# Altium PCB Programador_PCB.PcbDoc
Units mil, origin at the board's own origin, x right, y up, seen from the top; angles counter-clockwise.
Board outline 2505 x 845 mil, 2 copper layers (Top Layer, Bottom Layer); 47 components, 32 nets, 183 pads, 36 vias.
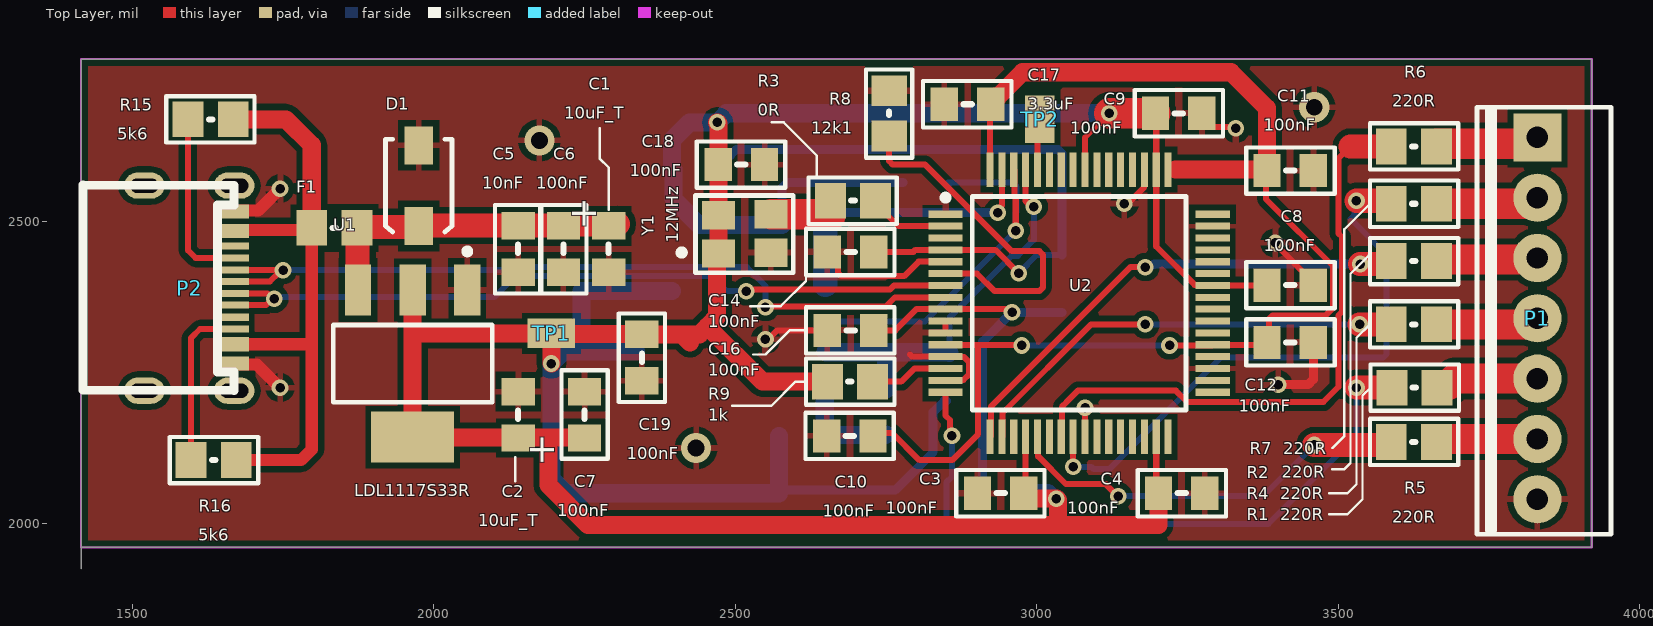
[diagram p0: Top Layer view]
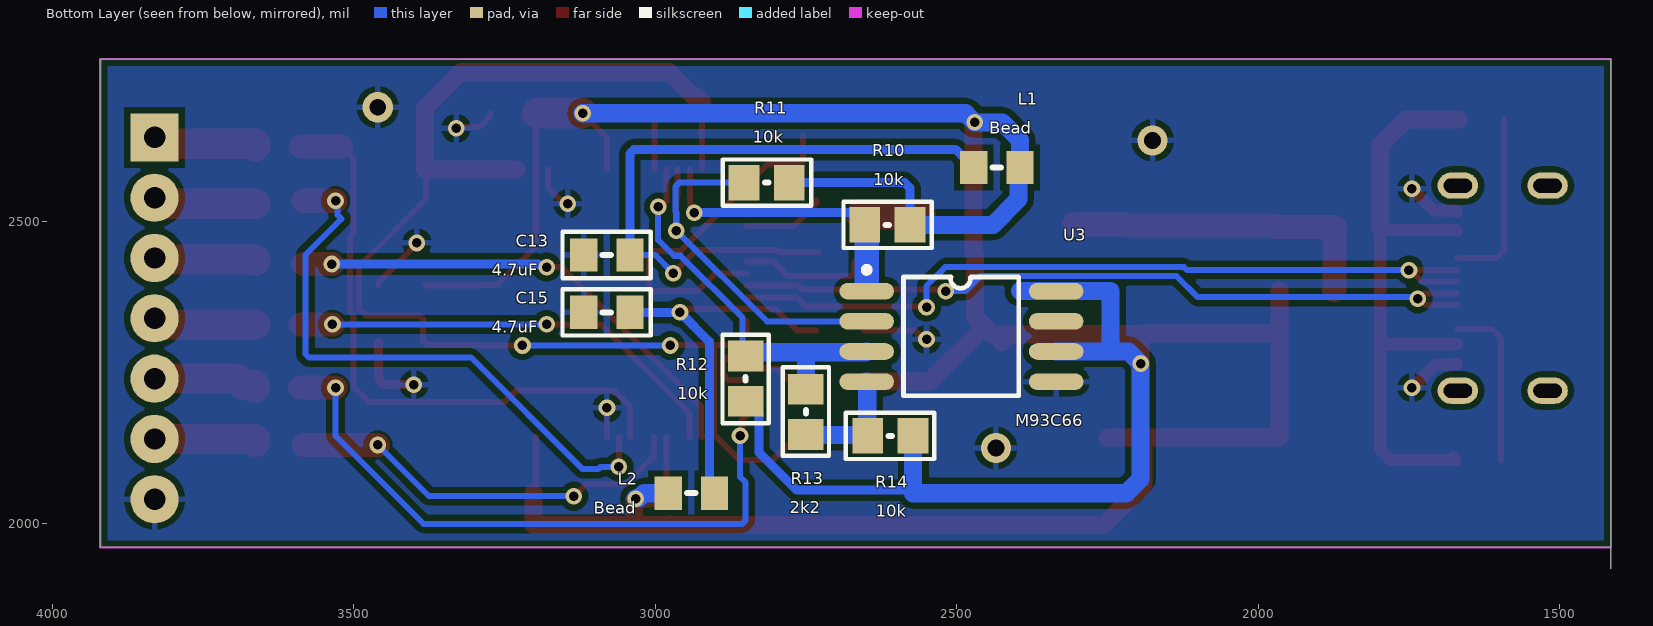
[diagram p1: Bottom Layer view, seen from below]
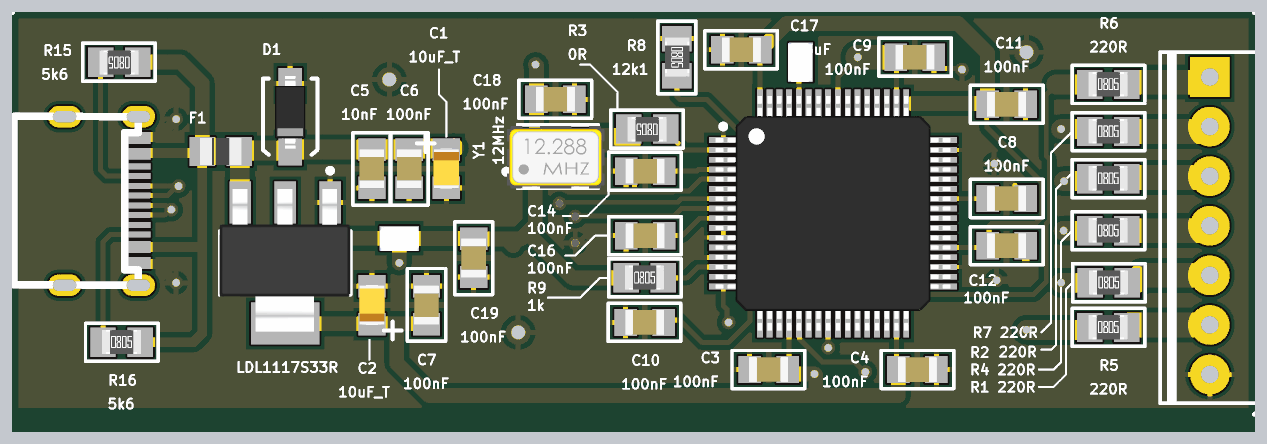
[diagram p2: 3D render of the assembled board from above, using the file's embedded part models]
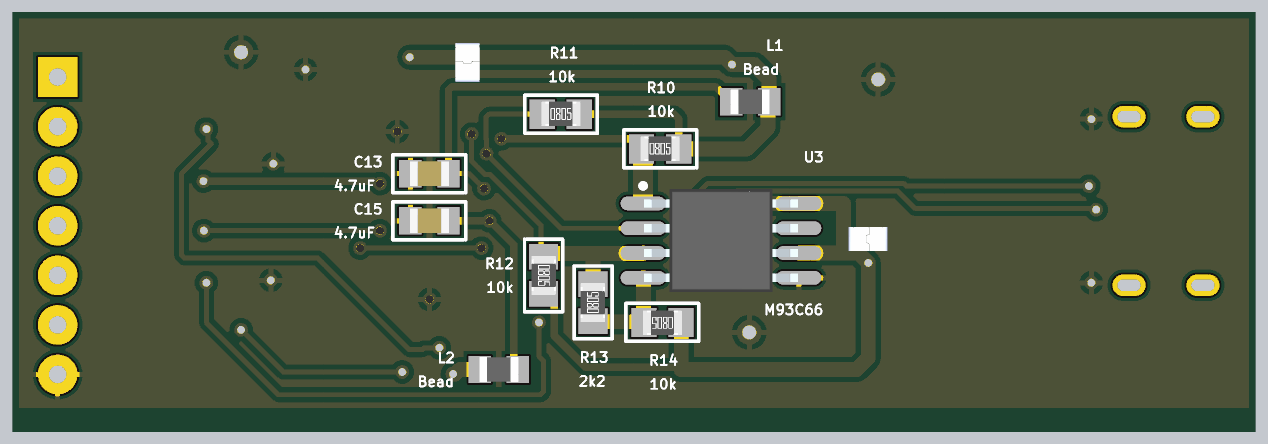
[diagram p3: 3D render of the assembled board from below, using the file's embedded part models]

## Layer stack, top to bottom
Top Solder: solder mask 0.4, Solder Resist, Dk 3.5
Top Layer: signal copper 1.4
Dielectric 1: dielectric 12.6, FR-4, Dk 4.8
Bottom Layer: signal copper 1.4
Bottom Solder: solder mask 0.4, Solder Resist, Dk 3.5

## Board outline
1415,1925 1415,2770 3920,2770 3920,1960 1415,1960

## Design rules (kind name [scope] priority, off if disabled: settings)
Clearance [All] p1: gap=10 ignorepadtopadclearanceinfootprint=FALSE except(0: Arc-Hole Track-Hole SMDPad-Hole THPad-Hole Via-Hole Fill-Hole Poly-Hole Region-Hole Text-Hole; 5: Arc-Arc Arc-Track Arc-SMDPad Arc-THPad Arc-Text Track-Track Track-SMDPad Track-THPad Track-Text SMDPad-SMDPad SMDPad-THPad SMDPad-Text THPad-THPad THPad-Text Via-Text Fill-Text Poly-Text Region-Text Text-Text)
PolygonConnect [All] p1: connectstyle=Relief reliefconductorwidth=10 reliefentries=4 polygonreliefangle="90 Angle" airgapwidth=10
RoutingVias [All] p1: holewidth=15.75 width=27.56 viastyle="Through Hole" minholewidth=15.75 minwidth=27.56 maxholewidth=15.75 maxwidth=27.56
SilkToSolderMaskClearance [IsPad] p1: minsilkscreentomaskgap=5 clearancetoexposedcopper=TRUE
SolderMaskExpansion [All] p1: expansion=4 istentingtop=FALSE
Width [All] p1: maxlimit=50 minlimit=10 preferedwidth=15 minimp=50.000000 maximp=50.000000 favimp=50.000000
29 further rules are at their usual default settings.

## Classes and differential pairs
component class USB_Programmer: C3 C4 C8 C9 C10 C11 C12 C13 C14 C15 C16 C17 C18 C19 L1 L2 P1 R1 R2 R3 R4 R5 R6 R7 R8 R9 R10 R11 R12 R13 R14 TP2 U2 U3 Y1
component class Power: C1 C2 C5 C6 C7 D1 F1 P2 R15 R16 TP1 U1

## Components (designator, comment, footprint, x,y, rotation, side; value= is the part's Value field where it differs from the comment)
C1 "10uF_T" C_0805_2013_c 2290,2455 r270 top
C2 "10uF_T" C_0805_2013_c 2140,2180 r90 top
C3 "100nF" C_0805_2013_b 2940,2050 r0 top
C4 "100nF" C_0805_2013_b 3240,2050 r180 top
C5 "10nF" C_0805_2013_b 2140,2455 r90 top
C6 "100nF" C_0805_2013_b 2215,2455 r90 top
C7 "100nF" C_0805_2013_b 2250,2180 r270 top
C8 "100nF" C_0805_2013_b 3420,2395 r180 top
C9 "100nF" C_0805_2013_b 3235,2680 r180 top
C10 "100nF" C_0805_2013_b 2690,2145 r0 top
C11 "100nF" C_0805_2013_b 3420,2585 r180 top
C12 "100nF" C_0805_2013_b 3420,2300 r180 top
C13 "4.7uF" C_0805_2013_b 3080,2445 r180 bottom
C14 "100nF" C_0805_2013_b 2690.98,2450 r0 top
C15 "4.7uF" C_0805_2013_b 3080,2350 r180 bottom
C16 "100nF" C_0805_2013_b 2690.98,2320 r0 top
C17 "3.3uF" C_0805_2013_b 2885,2695 r0 top value=0
C18 "100nF" C_0805_2013_b 2510,2595 r0 top
C19 "100nF" C_0805_2013_b 2345,2275 r90 top
D1 "MMSZ5231C-HE3_A-08" D_SOD-123 1975,2560 r270 top
F1 "0" F_0805_2012 1835,2490 r0 top
L1 "Bead" L_0805_2013 2433.39,2590 r0 bottom
L2 "Bead" L_0805_2013 2940,2050 r180 bottom
P1 "BORNERA 6 ENCH" P_CON1X7 3830,2290 r270 top
P2 "Conector_USB TIPO C" P_USB_C 1592,2544 r270 top
R1 "220R" R_0805_2012_a 3625.98,2225 r0 top
R2 "220R" R_0805_2012_a 3625,2435 r0 top
R3 "0R" R_0805_2012_a 2695,2535 r180 top
R4 "220R" R_0805_2012_a 3625,2330 r0 top
R5 "220R" R_0805_2012_a 3625,2135 r0 top
R6 "220R" R_0805_2012_a 3625,2625 r0 top
R7 "220R" R_0805_2012_a 3625,2530 r0 top
R8 "12k1" R_0805_2012_a 2755,2680 r270 top
R9 "1k" R_0805_2012_a 2690,2235 r0 top
R10 "10k" R_0805_2012_a 2615,2495 r180 bottom
R11 "10k" R_0805_2012_a 2815,2565 r180 bottom
R12 "10k" R_0805_2012_a 2850,2240 r270 bottom
R13 "2k2" R_0805_2012_a 2750,2185 r90 bottom
R14 "10k" R_0805_2012_a 2610,2145 r0 bottom
R15 "5k6" R_0805_2012_a 1630,2670 r180 top
R16 "5k6" R_0805_2012_a 1635,2105 r0 top
TP1 "SMD Test Point" "TP SMD" 2195,2315 r0 top
TP2 "Test Point suspended" "TP SMD" 3005,2670 r270 top
U1 "LDL1117S33R" U_SOT-223 1965,2265 r270 top value=LDL1117S25R
U2 "Value" U_TQFP-64 3070,2365 r0 top
U3 "M93C66" U_SO-8 2492.09,2310 r180 bottom
Y1 "12MHz" Y_SMD-XTAL-12MHz 2510,2480 r90 top

## Footprints (in the part's own frame and the unit in brackets; to place one, negate y for a bottom-side part, rotate by r counter-clockwise, add the part's x,y. Pads: shape width x height; smd on the part's side, far side on the other; paste and mask are expansions set on the pad)
C_0805_2013_b [mm] "Chip Capacitor; Body 2.0 x 1.3 mm (LxW typ)"
  rect 1.15x1.4 smd: 1(-0.975,0) 2(0.975,0)
  silkscreen extent -1.88,-0.97 1.85,0.97, body extent -1,-0.64 1,0.64, height 1.24
C_0805_2013_c [mm] "Chip Capacitor; Body 2.0 x 1.3 mm (LxW typ)"
  rect 1.15x1.4 smd: 1(-0.975,0) 2(0.975,0)
  silkscreen extent -0.18,0 0.18,0, body extent -1.02,-0.65 1.03,0.65, height 1.2
D_SOD-123 [mm] "SOD-123; 2 Leads; Body 2.7 x 1.6 mm, (LxW)"
  rect 1.6x1.2 smd: 1(1.7,0) 2(-1.7,0)
  silkscreen extent -1.95,-1.4 1.95,1.4, body extent -2.09,-0.78 1.63,0.77, height 1.35
F_0805_2012 [mm] "Chip Fuse; Body 2.0 x 1.3 mm (LxW typ)"
  rect 1.3x1.5 smd: 1(-0.95,0) 2(0.95,0)
  silkscreen extent -0.08,0 0.08,0, body extent -1.05,-0.7 1.05,0.7, height 0.56
L_0805_2013 [mm] "Chip Inductor; Body 2.0 x 1.3 mm (LxW typ)"
  rect 1.15x1.4 smd: 1(-0.975,0) 2(0.975,0)
  silkscreen extent -0.18,0 0.18,0, body extent -1,-0.64 1,0.64, height 1.04
P_CON1X7 [mil]
  rect 80x80 hole 35.43: 1(-350,0)
  round 80 hole 35.43: 2(-250,0) 3(-150,0) 4(-50,0) 5(50,0) 6(150,0) 7(250,0)
  silkscreen extent -400,-100 308,122
P_USB_C [mm]
  rect 0.6x1.2 smd: 1(0.686,1.981) 2(1.499,1.981) 11(6.274,1.981) 12(7.087,1.981)
  rect 0.3x1.2 smd: 3(2.14,1.977) 4(2.636,1.976) 5(3.144,1.972) 6(3.632,1.981) 7(4.14,1.981) 8(4.628,1.972) 9(5.136,1.976) 10(5.632,1.977)
  oval 1.1x1.7 hole 0.6 slot 1.2 at 90 deg: 15(-0.406,1.956) 16(-0.406,-1.829) 17(8.23,1.956) 18(8.23,-1.829)
  silkscreen extent -0.43,-4.42 8.23,1.96
R_0805_2012_a [mm] "Chip Resistor; Body 2.0 x 1.3 mm (LxW typ)"
  rect 1.3x1.5 smd: 1(-0.95,0) 2(0.95,0)
  silkscreen extent -1.85,-0.97 1.88,0.97, body extent -1,-0.61 1,0.64, height 0.6
"TP SMD" [mm] "Test Point SMD"
  rect 2x1.25 smd: 1(0,0)
  body extent -0.99,-0.67 1.01,0.58, height 0.84
U_SO-8 [mm] "SOC, 8-Leads, Body 8x5.3mm, Pitch 1.27mm, IPC Low Density"
  oval 2.3x0.7 smd: 1(-3.99,1.905) 2(-3.99,0.635) 3(-3.99,-0.635) 4(-3.99,-1.905) 5(3.99,-1.905) 6(3.99,-0.635) 7(3.99,0.635) 8(3.99,1.905)
  silkscreen extent -4.11,-2.5 2.41,2.93, body extent -3.95,-2.64 3.95,2.64, height 2.16
U_SOT-223 [mm]
  rect 2.15x1.1 smd: 1(-3.1,2.3) 2(-3.1,0) 3(-3.1,-2.3)
  rect 2.15x3.5 smd: 4(3.1,0)
  silkscreen extent -4.85,-3.35 1.63,3.35, body extent -3.78,-3.37 3.52,3.33, height 1.8
U_TQFP-64 [mm]
  rect 1.45x0.3 smd: 1(-5.625,3.75) 2(-5.625,3.25) 3(-5.625,2.75) 4(-5.625,2.25) 5(-5.625,1.75) 6(-5.625,1.25) 7(-5.625,0.75) 8(-5.625,0.25) 9(-5.625,-0.25) 10(-5.625,-0.75) 11(-5.625,-1.25) 12(-5.625,-1.75) 13(-5.625,-2.25) 14(-5.625,-2.75) 15(-5.625,-3.25) 16(-5.625,-3.75) 33(5.625,-3.75) 34(5.625,-3.25) 35(5.625,-2.75) 36(5.625,-2.25) 37(5.625,-1.75) 38(5.625,-1.25) 39(5.625,-0.75) 40(5.625,-0.25) 41(5.625,0.25) 42(5.625,0.75) 43(5.625,1.25) 44(5.625,1.75) 45(5.625,2.25) 46(5.625,2.75) 47(5.625,3.25) 48(5.625,3.75)
  rect 0.3x1.45 smd: 17(-3.75,-5.625) 18(-3.25,-5.625) 19(-2.75,-5.625) 20(-2.25,-5.625) 21(-1.75,-5.625) 22(-1.25,-5.625) 23(-0.75,-5.625) 24(-0.25,-5.625) 25(0.25,-5.625) 26(0.75,-5.625) 27(1.25,-5.625) 28(1.75,-5.625) 29(2.25,-5.625) 30(2.75,-5.625) 31(3.25,-5.625) 32(3.75,-5.625) 49(3.75,5.625) 50(3.25,5.625) 51(2.75,5.625) 52(2.25,5.625) 53(1.75,5.625) 54(1.25,5.625) 55(0.75,5.625) 56(0.25,5.625) 57(-0.25,5.625) 58(-0.75,5.625) 59(-1.25,5.625) 60(-1.75,5.625) 61(-2.25,5.625) 62(-2.75,5.625) 63(-3.25,5.625) 64(-3.75,5.625)
  silkscreen extent -5.75,-4.5 4.5,4.57, body extent -6.01,-6.01 6.01,6.01, height 1.55
Y_SMD-XTAL-12MHz [mil]
  rect 47.24x55.12 smd: 1(-32.5,38) 2(-31,-49) 3(32.5,-49) 4(31,38)
  silkscreen extent -64,-86 64,104, body extent -65,-99 61,98, height 47

## Part data
C1 C2: library part C_10uF_10V_b, "Capacitor SMD 0805 Tant", Manufacturer=Vishay, Manufacturer Part Number=TMCP1A106MTRF, Supplier Part Number 1=74-TMCP1A106MTRF, Category="Tantalum Capacitors", Pricing 1="1=0,3, 10=0,152, 50=0,152, 100=0,098, 1000=0,082, 10000=0,067 (USD)", RoHS=Yes, RoHS Compliant=Yes, Stock 1=7293, Supplier 1=Mouser
C3 C4 C6 C7 C8 C9 C10 C11 C12 C14 C16 C18 C19: library part C_100nF_50V_b, "Capacitor SMD 0805", Case Code (Imperial)=0805, Case Code (Metric)=2012, Dielectric=X7R, Insulation Resistance=100GR, Manufacturer=Yageo, Manufacturer Part Number=CC0805KRX7R9BB104, Max Operating Temperature=125°C, Min Operating Temperature=-55°C, Package Quantity=4000, Supplier Part Number 1=311-1140-1-ND, Tolerance=10%, Voltage=50V, Case/Package=0805, Category="Ceramic Capacitors", ComponentLink1Description=https://datasheet.ciiva.com/11786/0900766b80d84f1d-11786009.pdf?src-supplier=Rs, ComponentLink1URL=https://datasheet.ciiva.com/11786/0900766b80d84f1d-11786009.pdf?src-supplier=Rs, ComponentLink2Description=https://datasheet.ciiva.com/46393/1734573-46393307.pdf?src-supplier=Element14, ComponentLink2URL=https://datasheet.ciiva.com/46393/1734573-46393307.pdf?src-supplier=Element14, ComponentLink3Description=https://datasheet.ciiva.com/155/mlccorderingcode-155930.pdf?src-supplier=Digikey, ComponentLink3URL=https://datasheet.ciiva.com/155/mlccorderingcode-155930.pdf?src-supplier=Digikey, ComponentLink4Description=https://datasheet.ciiva.com/155/mlccorderingcode-155929.pdf?src-supplier=Digikey, ComponentLink4URL=https://datasheet.ciiva.com/155/mlccorderingcode-155929.pdf?src-supplier=Digikey, ComponentLink5Description=https://datasheet.ciiva.com/155/mlccorderingcode-155931.pdf?src-supplier=Digikey, ComponentLink5URL=https://datasheet.ciiva.com/155/mlccorderingcode-155931.pdf?src-supplier=Digikey, ComponentLink6Description=https://datasheet.ciiva.com/11464/upy-gphc-x7r-6-3v-to-50v-8-11464757.pdf?src-supplier=Avnet, ComponentLink6URL=https://datasheet.ciiva.com/11464/upy-gphc-x7r-6-3v-to-50v-8-11464757.pdf?src-supplier=Avnet, ComponentLink7Description=https://datasheet.ciiva.com/28450/1489800-28450805.pdf?src-supplier=Element14, ComponentLink7URL=https://datasheet.ciiva.com/28450/1489800-28450805.pdf?src-supplier=Element14, ComponentLink8Description=https://datasheet.ciiva.com/29242/445210-da-01-en-kerko-chip-0805-x7r-0-1uf-10proz-50vg-29242074.pdf?src-supplier=Conrad, ComponentLink8URL=https://datasheet.ciiva.com/29242/445210-da-01-en-kerko-chip-0805-x7r-0-1uf-10proz-50vg-29242074.pdf?src-supplier=Conrad, Depth=1.25mm, Halogen Free=5694HalogenFree, Height=0.85mm, Lead Free=5697LeadFree, Length=2mm, Material=Ceramic, Mounting Technology="Surface Mount", Packaging="Tape and Reel", Pins=2, Pricing 1="1=0,1, 10=0,07, 50=0,0418, 100=0,0329, 500=0,02428, 1000=0,0201 (USD)", Radiation Hardening=No, Reach SVHC Compliant=No, RoHS=Yes, RoHS Compliant=Yes, Series=CC, Stock 1=5306374, Supplier 1=Digikey, Termination=SMD/SMT, Voltage Rating=50V
C5: library part C_10nF_50V_b, "Capacitor SMD 0805", Case Code (Imperial)=0805, Case Code (Metric)=2012, Dielectric=X7R, Dielectric Material=Ceramic, Manufacturer=KEMET, Manufacturer Part Number=C0805C103J5RAC7210, Max Operating Temperature=125°C, Min Operating Temperature=-55°C, Package Quantity=10000, Supplier Part Number 1=80-C0805C103J5R7210, Tolerance=5%, Voltage Rating=50V, Case/Package=0805, Category="Ceramic Capacitors", ComponentLink1Description=http://www.mouser.com/ds/2/212/KEM_C1002_X7R_SMD-1102033.pdf?src-supplier=Mouser, ComponentLink1URL=http://www.mouser.com/ds/2/212/KEM_C1002_X7R_SMD-1102033.pdf?src-supplier=Mouser, ComponentLink2Description=http://components.arrow.com/part/dataview/3450688S9650973N7429?src-supplier=Arrow+Electronics, ComponentLink2URL=http://components.arrow.com/part/dataview/3450688S9650973N7429?src-supplier=Arrow+Electronics, ComponentLink3Description=https://datasheet.octopart.com/C0805C103J5RAC7210-KEMET-datasheet-68331906.pdf?src-supplier=Farnell, ComponentLink3URL=https://datasheet.octopart.com/C0805C103J5RAC7210-KEMET-datasheet-68331906.pdf?src-supplier=Farnell, ComponentLink4Description=https://api.kemet.com/component-edge/download/datasheet/C0805C103J5RAC7210.pdf?src-supplier=Digikey, ComponentLink4URL=https://api.kemet.com/component-edge/download/datasheet/C0805C103J5RAC7210.pdf?src-supplier=Digikey, ComponentLink5Description=https://datasheet.octopart.com/C0805C103J5RAC7210-KEMET-datasheet-37550250.pdf?src-supplier=Electro+Sonic, ComponentLink5URL=https://datasheet.octopart.com/C0805C103J5RAC7210-KEMET-datasheet-37550250.pdf?src-supplier=Electro+Sonic, ComponentLink6Description=https://datasheet.octopart.com/C0805C103J5RAC7210-KEMET-datasheet-166547538.pdf?src-supplier=TME, ComponentLink6URL=https://datasheet.octopart.com/C0805C103J5RAC7210-KEMET-datasheet-166547538.pdf?src-supplier=TME, Depth=1.25mm, Lead Pitch=0.75mm, Length=2mm, Packaging="Tape and Reel", Pricing 1="1=0,1, 10=0,034, 50=0,034, 100=0,02, 1000=0,014, 10000=0,009 (USD)", RoHS=Yes, RoHS Compliant=Yes, Series="SMD Comm X7R", Stock 1=30128, Supplier 1=Mouser, Termination=SMD/SMT, Voltage Rating (DC)=50V
C13 C15: library part C_4.7uF_10V_b, "(Modificar) Capacitor SMD 0805"
C17: library part C_?F_?_b, "(Generico) Capacitor SMD 0805"
D1: library part D_MMSZ5231C-HE3_A-08, "Diode SMD SOD-123 Zener 5V1", Manufacturer="Vishay Semiconductors", Manufacturer Part Number=MMSZ5226C-E3-08, Max Operating Temperature=150°C, Max Power Dissipation=500mW, Max Reverse Leakage Current=25uA, Min Operating Temperature=-55°C, Package Quantity=3000, Supplier Part Number 1=78-MMSZ5231CHE3_A-08, Tolerance=2%, Zener Current=20mA, Zener Voltage=3.3V, Category="Zener Diodes", ComponentLink1Description=Datasheet, ComponentLink1URL=https://www.vishay.com/docs/86344/mmsz5225_to_mmsz5267.pdf, Impedance=28R, Mounting Technology="Surface Mount", Packaging="Tape and Reel", Power Dissipation=500mW, Pricing 1="1=0,29, 10=0,198, 50=0,198, 100=0,089, 1000=0,062, 10000=0,041 (USD)", RoHS=Yes, RoHS Compliant=Yes, Series="Automotive, AEC-Q101", Stock 1=14347, Supplier 1=Mouser, Voltage Tolerance=2%, Weight=0.000363oz
F1: library part F_?_0805, "(Generico) Fuse SMD 0805", Supplier Part Number 1=SF-1206S200-2CT-ND, LatestRevisionDate=17-Jul-2002, LatestRevisionNote="Re-released for DXP Platform.", Origin=TAIWAN, PackageDescription="Thru-Hole; 2 Leads", PackageReference=PIN-W2/E2.8, Published=8-Jun-2000, Publisher="Altium Limited", Supplier 1=Digi-Key
L1 L2: library part L_Bead, "Inductor SMD 0805", Case Code (Imperial)=0805, Case Code (Metric)=2012, Manufacturer=Pulse, Manufacturer Part Number=PE-0805PFB600ST, Max Current Rating=3A, Max Operating Temperature=105°C, Min Operating Temperature=-40°C, Package Quantity=4000, Supplier Part Number 1=673-PE-0805PFB600ST, Case/Package=0805, Category="Ferrite Beads and Chips", ComponentLink1Description=https://productfinder.pulseeng.com/doc_type/WEB301/doc_num/WC706/doc_part/WC706.pdf?src-supplier=Digikey, ComponentLink1URL=https://productfinder.pulseeng.com/doc_type/WEB301/doc_num/WC706/doc_part/WC706.pdf?src-supplier=Digikey, ComponentLink2Description=http://productfinder.pulseeng.com/products/datasheets/WC706.pdf?src-supplier=Digikey, ComponentLink2URL=http://productfinder.pulseeng.com/products/datasheets/WC706.pdf?src-supplier=Digikey, Height=0.041inch, Length=0.079inch, Mounting Technology="Surface Mount", Number of Lines=1, Packaging="Cut Tape", Pricing 1="1=0,1, 10=0,051, 50=0,051, 100=0,035, 1000=0,025, 10000=0,02 (USD)", RoHS=Yes, RoHS Compliant=Yes, Series=PFB, Stock 1=58506, Supplier 1=Mouser, Width=0.049inch
P1: library part "P_BORNERA 7", "Bornera 7"
P2: library part P_USB_C, "Conector USB tip C basico", Supplier Part Number 1=179-UJ20CHGSMT1P16TR, Supplier 1=Mouser
R1 R2 R4 R5 R6 R7: library part R_220R_b, "Resistor SMD 0805", Case Code (Imperial)=0805, Case Code (Metric)=2012, Manufacturer=Bourns, Manufacturer Part Number=CR0805-FX-2200ELF, Max Operating Temperature=155°C, Max Power Dissipation=125mW, Min Operating Temperature=-55°C, Package Quantity=5000, Supplier Part Number 1=CR0805-FX-2200ELFCT-ND, Temperature Coefficient=100ppm/°C, Tolerance=1%, Voltage Rating=150V, Case/Package=0805, Category="Chip SMD Resistors", ComponentLink1Description=https://datasheet.ciiva.com/5540/chpreztr-5540846.pdf?src-supplier=Mouser, ComponentLink1URL=https://datasheet.ciiva.com/5540/chpreztr-5540846.pdf?src-supplier=Mouser, Contact Plating=Tin, Features="Moisture Resistant", Height=0.5mm, Length=2mm, Mounting Technology="Surface Mount", Number of Terminations=2, Packaging="Tape and Reel", Power Rating=125mW, Pricing 1="1=0,1, 10=0,021, 50=0,0132, 100=0,011, 500=0,00744, 1000=0,00639 (USD)", Radiation Hardening=No, RoHS=Yes, RoHS Compliant=Yes, Series=CR0805, Stock 1=162372, Supplier 1=Digikey, Termination=SMD/SMT, Thickness=508um, Width=1.25mm
R3: library part R_0R_b, "Resistor SMD 0805", Case Code (Imperial)=0805, Case Code (Metric)=2012, Manufacturer="Stackpole Electronics", Manufacturer Part Number=RMCF0805ZT0R00, Max Operating Temperature=155°C, Max Power Dissipation=125mW, Min Operating Temperature=-55°C, Ratings=AEC-Q200, Supplier Part Number 1=RMCF0805ZT0R00CT-ND, Temperature Coefficient=200ppm/°C, Voltage Rating=150V, Case/Package=0805, Category="Chip SMD Resistors", ComponentLink1Description=https://datasheet.ciiva.com/15193/getdatasheetpartid-360417-15193658.pdf?src-supplier=Verical, ComponentLink1URL=https://datasheet.ciiva.com/15193/getdatasheetpartid-360417-15193658.pdf?src-supplier=Verical, Construction=Rectangular, Contact Plating=Tin,Matte, Depth=1.25mm, Features="Automotive AEC-Q200", Height=0.026inch, Lead Free="Lead Free", Length=2mm, Military Standard=Not, Mounting Technology="Surface Mount", Number of Terminations=2, Packaging="Tape and Reel", Power Rating=125mW, Pricing 1="1=0,1, 10=0,017, 25=0,0128, 50=0,0096, 100=0,0068, 250=0,00544, 500=0,00436, 1000=0,00321 (USD)", Radiation Hardening=No, RoHS=Yes, RoHS Compliant=Yes, Series=RMCF, Stock 1=1321891, Supplier 1=Digikey, Width=0.049inch
R8: library part R_12k1_b, "Resistor SMD 0805", Case Code (Imperial)=0805, Case Code (Metric)=2012, Manufacturer="Stackpole Electronics", Manufacturer Part Number=RMCF0805FT12K1, Max Operating Temperature=155°C, Max Power Dissipation=125mW, Min Operating Temperature=-55°C, Ratings=AEC-Q200, Supplier Part Number 1=RMCF0805FT12K1CT-ND, Temperature Coefficient=100ppm/°C, Tolerance=1%, Case/Package=0805, Category="Chip SMD Resistors", ComponentLink1Description=https://datasheet.ciiva.com/15193/getdatasheetpartid-483936-15193530.pdf?src-supplier=Verical, ComponentLink1URL=https://datasheet.ciiva.com/15193/getdatasheetpartid-483936-15193530.pdf?src-supplier=Verical, Construction=Rectangular, Contact Plating=Tin,Matte, Depth=1.25mm, Features="Automotive AEC-Q200", Height=0.026inch, Lead Free="Lead Free", Length=0.079inch, Military Standard=Not, Mounting Technology="Surface Mount", Number of Terminations=2, Packaging="Tape and Reel", Power Rating=125mW, Pricing 1="1=0,1, 10=0,02, 50=0,0124, 100=0,0103, 500=0,007, 1000=0,00601 (USD)", Radiation Hardening=No, RoHS=Yes, RoHS Compliant=Yes, Series=RMCF, Stock 1=644845, Supplier 1=Digikey, Width=0.049inch
R9: library part R_1k_b, "Resistor SMD 0805", Case Code (Imperial)=0805, Case Code (Metric)=2012, Manufacturer=Bourns, Manufacturer Part Number=CR0805-FX-1001ELF, Max Operating Temperature=155°C, Max Power Dissipation=125mW, Min Operating Temperature=-55°C, Package Quantity=5000, Resistance Tolerance=1%, Resistor Type="Thick Film", Supplier Part Number 1=CR0805-FX-1001ELFCT-ND, Temperature Coefficient=100ppm/°C, Voltage Rating=150V, Case/Package=0805, Category="Chip SMD Resistors", ComponentLink1Description=https://datasheet.ciiva.com/11810/0900766b80fcdb72-11810305.pdf?src-supplier=Rs, ComponentLink1URL=https://datasheet.ciiva.com/11810/0900766b80fcdb72-11810305.pdf?src-supplier=Rs, ComponentLink2Description=https://datasheet.ciiva.com/27049/775383-27049976.pdf?src-supplier=Jameco, ComponentLink2URL=https://datasheet.ciiva.com/27049/775383-27049976.pdf?src-supplier=Jameco, ComponentLink3Description=https://datasheet.ciiva.com/7986/1856384-7986222.pdf?src-supplier=Element14, ComponentLink3URL=https://datasheet.ciiva.com/7986/1856384-7986222.pdf?src-supplier=Element14, ComponentLink4Description=https://datasheet.ciiva.com/9123/chpreztr-9123643.pdf?src-supplier=Avnet, ComponentLink4URL=https://datasheet.ciiva.com/9123/chpreztr-9123643.pdf?src-supplier=Avnet, ComponentLink5Description=https://datasheet.ciiva.com/6547/chpreztr-6547422.pdf?src-supplier=Digikey, ComponentLink5URL=https://datasheet.ciiva.com/6547/chpreztr-6547422.pdf?src-supplier=Digikey, ComponentLink6Description=https://datasheet.ciiva.com/6547/chpreztr-6547423.pdf?src-supplier=Digikey, ComponentLink6URL=https://datasheet.ciiva.com/6547/chpreztr-6547423.pdf?src-supplier=Digikey, ComponentLink7Description=https://datasheet.ciiva.com/6547/chpreztr-6547421.pdf?src-supplier=Digikey, ComponentLink7URL=https://datasheet.ciiva.com/6547/chpreztr-6547421.pdf?src-supplier=Digikey, ComponentLink8Description=https://datasheet.ciiva.com/30129/159chpreztr-30129981.pdf?src-supplier=Onlinecomponents.com, ComponentLink8URL=https://datasheet.ciiva.com/30129/159chpreztr-30129981.pdf?src-supplier=Onlinecomponents.com, ComponentLink9Description=https://datasheet.ciiva.com/46394/691949-46394380.pdf?src-supplier=Element14, ComponentLink9URL=https://datasheet.ciiva.com/46394/691949-46394380.pdf?src-supplier=Element14, ComponentLink10Description=https://datasheet.ciiva.com/16722/70154685-16722677.pdf?src-supplier=Allied+Electronics, ComponentLink10URL=https://datasheet.ciiva.com/16722/70154685-16722677.pdf?src-supplier=Allied+Electronics, ComponentLink11Description=https://datasheet.ciiva.com/48692/001055506-da-01-en-smd-wid-cr0805-fx-1001elf-1k-ohm-1-8w-48692106.pdf?src-supplier=Conrad, ComponentLink11URL=https://datasheet.ciiva.com/48692/001055506-da-01-en-smd-wid-cr0805-fx-1001elf-1k-ohm-1-8w-48692106.pdf?src-supplier=Conrad, Contact Plating=Tin, Depth=1.25mm, Features="Moisture Resistant", Height=0.5mm, Length=2mm, Mounting Technology="Surface Mount", Number of Terminations=2, Packaging="Tape and Reel", Pins=2, Power Rating=125mW, Pricing 1="1=0,1, 10=0,021, 50=0,0132, 100=0,011, 500=0,00744, 1000=0,00639 (USD)", Radiation Hardening=No, Reach SVHC Compliant=No, RoHS=Yes, RoHS Compliant=Yes, Series=CR0805, Stock 1=453972, Supplier 1=Digikey, Technology="THICK FILM", Termination=SMD/SMT, Thickness=508um, Tolerance=1%, Voltage Rating (DC)=150V, Width=1.25mm
R10 R11 R12 R14: library part R_10k_b, "Resistor SMD 0805", Case Code (Imperial)=0805, Case Code (Metric)=2012, Manufacturer=Yageo, Manufacturer Part Number=AC0805FR-0710KL, Max Operating Temperature=155°C, Max Power Dissipation=125mW, Min Operating Temperature=-55°C, Package Quantity=1, Supplier Part Number 1=311-10KLGCT-ND, Temperature Coefficient=100ppm/°C, Tolerance=1%, Voltage Rating=150V, Case/Package=0805, Category="Chip SMD Resistors", ComponentLink1Description=http://www.yageo.com/NewPortal/yageodocoutput?fileName=/pdf/R-Chip/PYu-AC_51_RoHS_L_6.pdf&src-supplier=Digikey, ComponentLink1URL=http://www.yageo.com/NewPortal/yageodocoutput?fileName=/pdf/R-Chip/PYu-AC_51_RoHS_L_6.pdf&src-supplier=Digikey, ComponentLink2Description=http://www.yageo.com/documents/recent/PYu-AC_51_RoHS_L_2_revised.pdf?src-supplier=Future+Electronics, ComponentLink2URL=http://www.yageo.com/documents/recent/PYu-AC_51_RoHS_L_2_revised.pdf?src-supplier=Future+Electronics, ComponentLink3Description=http://www.yageo.com/NewPortal/yageodocoutput?fileName=/pdf/R-Chip/PYu-AC_51_RoHS_L_6.pdf&src-supplier=NAC+Semi, ComponentLink3URL=http://www.yageo.com/NewPortal/yageodocoutput?fileName=/pdf/R-Chip/PYu-AC_51_RoHS_L_6.pdf&src-supplier=NAC+Semi, ComponentLink4Description=http://www.yageo.com/NewPortal/yageodocoutput?fileName=/pdf/R-Chip/PYu-AC_51_RoHS_L_6.pdf&src-supplier=Rutronik, ComponentLink4URL=http://www.yageo.com/NewPortal/yageodocoutput?fileName=/pdf/R-Chip/PYu-AC_51_RoHS_L_6.pdf&src-supplier=Rutronik, Construction=Rectangular, Depth=1.25mm, Features="Moisture Resistant,Automotive AEC-Q200,Anti-Sulfur", Height=0.024inch, Lead Free="Lead Free", Length=0.079inch, Military Standard=Not, Number of Terminations=2, Packaging="Tape and Reel", Power Rating=125mW, Pricing 1="1=0,1, 10=0,031, 50=0,0198, 100=0,0166, 500=0,01152, 1000=0,00997 (USD)", RoHS=Yes, RoHS Compliant=Yes, Series=AC, Stock 1=480247, Supplier 1=Digikey, Termination=SMD/SMT, Width=0.049inch
R13: library part R_2k2_b, "Resistor SMD 0805", Case Code (Imperial)=0805, Case Code (Metric)=2012, Manufacturer=Bourns, Manufacturer Part Number=CR0805-FX-2201ELF, Max Operating Temperature=155°C, Min Operating Temperature=-55°C, Package Quantity=5000, Power Rating=125mW, Resistance Tolerance=1%, Resistor Type="Thick Film", Supplier Part Number 1=118-CR0805-FX-2201ELFCT-ND, Temperature Coefficient=100ppm/°C, Voltage Rating=150V, Case/Package=0805, Category="Chip SMD Resistors", ComponentLink1Description=https://datasheet.ciiva.com/22713/691949-22713256.pdf?src-supplier=Element14, ComponentLink1URL=https://datasheet.ciiva.com/22713/691949-22713256.pdf?src-supplier=Element14, ComponentLink2Description=https://datasheet.ciiva.com/5541/chpreztr-5541000.pdf?src-supplier=Mouser, ComponentLink2URL=https://datasheet.ciiva.com/5541/chpreztr-5541000.pdf?src-supplier=Mouser, Contact Plating=Tin, Height=0.5mm, Length=2mm, Mounting Technology="Surface Mount", Packaging="Tape and Reel", Pricing 1="1=0,1, 10=0,021, 50=0,0132, 100=0,011, 500=0,00744, 1000=0,00639 (USD)", Radiation Hardening=No, Reach SVHC Compliant=No, RoHS=Yes, RoHS Compliant=Yes, Series=CR0805, Stock 1=80126, Supplier 1=Digikey, Termination=SMD/SMT, Thickness=508um, Tolerance=1%, Voltage Rating (DC)=150V, Width=1.25mm
R15 R16: library part R_5k6_b, "Resistor SMD 0805", Case Code (Imperial)=0805, Case Code (Metric)=2012, Manufacturer="TE Connectivity", Manufacturer Part Number=CRG0805F5K6, Max Operating Temperature=125°C, Min Operating Temperature=-55°C, Number of Resistors=1, Power Rating=125mW, Resistor Type="Thick Film", Supplier Part Number 1=A126380CT-ND, Temperature Coefficient=100ppm/°C, Tolerance=1%, Voltage Rating=150V, Case/Package=0805, ComponentLink1Description=https://datasheet.ciiva.com/11809/0900766b800a696e-11809932.pdf?src-supplier=Rs, ComponentLink1URL=https://datasheet.ciiva.com/11809/0900766b800a696e-11809932.pdf?src-supplier=Rs, ComponentLink2Description=https://datasheet.ciiva.com/12563/eng-ds-1773204-g-12563327.pdf?src-supplier=Mouser, ComponentLink2URL=https://datasheet.ciiva.com/12563/eng-ds-1773204-g-12563327.pdf?src-supplier=Mouser, Depth=1.25mm, ELV=Compliant, Height=0.55mm, Length=2mm, Mounting Technology="Surface Mount", Number of Terminations=2, Packaging="Tape and Reel", Pricing 1="1=0,1, 10=0,034, 50=0,0218, 100=0,0182, 500=0,01264, 1000=0,01093 (USD)", RoHS=Yes, RoHS Compliant=Yes, Series=CRG, Stock 1=44154, Supplier 1=Digikey, Technology="THICK FILM", Termination=Solder, Width=1.25mm
TP1 TP2: library part P_T_TP, "Test Point SMD", Supplier Part Number 1=279-RCT-0C, LatestRevisionDate=17-Jul-2002, LatestRevisionNote="Re-released for DXP Platform.", Origin=CHINA, PackageDescription="Axial Device, Thru-Hole; 2 Leads; 0.3 in Pin Spacing", PackageReference=AXIAL-0.3, Published=8-Jun-2000, Publisher="Altium Limited", Supplier 1=Mouser, Type=CONNECTOR
U1: library part U_LDL1117, "LDL1117 Series 1.2 A 2.5 V High PSRR LDO Linear Voltage Regulator-SOT-223", Case/Package=TO-261-4, Manufacturer=STMicroelectronics, Manufacturer Part Number=LDL1117S25R, Max Operating Temperature=125°C, Max Supply Voltage=18V, Min Operating Temperature=-40°C, Min Output Voltage=2.5V, Min Supply Voltage=2.6V, Nominal Supply Current=250uA, Output Current=1.2A, Power Supply Rejection Ratio (PSRR)=65dB, Quiescent Current=500uA, Supplier Part Number 1=511-LDL1117S25R, Accuracy=2%, Category="Voltage Regulators - Linear", ComponentLink1Description=http://www.farnell.com/datasheets/2342741.pdf?src-supplier=Farnell, ComponentLink1URL=http://www.farnell.com/datasheets/2342741.pdf?src-supplier=Farnell, ComponentLink2Description=http://www.st.com/content/ccc/resource/technical/document/datasheet/group3/0e/5a/00/ca/10/1a/4f/a5/DM00366442/files/DM00366442.pdf/jcr:content/translations/en.DM00366442.pdf?src-supplier=Digikey, ComponentLink2URL=http://www.st.com/content/ccc/resource/technical/document/datasheet/group3/0e/5a/00/ca/10/1a/4f/a5/DM00366442/files/DM00366442.pdf/jcr:content/translations/en.DM00366442.pdf?src-supplier=Digikey, ComponentLink3Description=https://datasheet.octopart.com/LDL1117S25R-STMicroelectronics-datasheet-165583407.pdf?src-supplier=TME, ComponentLink3URL=https://datasheet.octopart.com/LDL1117S25R-STMicroelectronics-datasheet-165583407.pdf?src-supplier=TME, Height=1.8mm, Mounting Technology="Surface Mount", Number of Channels=1NUMBER, Number of Outputs=1NUMBER, Number of Regulators=1, Output Configuration=Positive, Output Type=Fixed, Output Voltage=2.5V, Packaging="Cut Tape", Pricing 1="1=1,1, 10=0,98, 50=0,935, 100=0,757, 1000=0,478, 10000=0,415 (USD)", RoHS=Yes, RoHS Compliant=Yes, Series=-, Stock 1=10345, Supplier 1=Mouser
U2: library part U_FT2232H, Supplier Part Number 1=768-1347-ND, Supplier 1=Digikey, Supplier 2="Arrow Electronics", Supplier Part Number 2=FT2232D-TRAY
U3: library part U_M93C66, Supplier Part Number 1=M93C66-WMN6TP, Supplier 1="Arrow Electronics"
Y1: library part Y_12MHZ, Supplier Part Number 1=XC2882CT-ND, Supplier 1=Digikey

## Via types
v1: diameter 27.56, hole 15.75, Top Layer to Bottom Layer, tented both sides, 33 vias
v2: diameter 50, hole 28, Top Layer to Bottom Layer, tented both sides, 3 vias

## Nets (pads, with @x,y where several pads share a name; then routed paths per layer and width w, separated by ;. In a path a pad name is that pad's centre, name@x,y a point inside that pad or via, vN(x,y) a via of type N, cw(c..) or ccw(c..) an arc to the next point about the centre after c; other vN are vias at no path point)
1V8: C10.2 C11.2 C12.2 C17.2 U2.12 U2.37 U2.49 U2.64 | length 2196.1
  Top Layer w10: C10.2@2728.39,2155 2733.55,2149.83 2760.17,2149.83 2805,2105 2859.95,2105 2902.09,2147.13 2902.09,2292.91 2898.9,2296.1 ; U2.12 2902.09,2296.1 2973.9,2296.1 v1(2975,2295) ; U2.64 C17.2@2922.36,2693.98 ; v1(3220,2295) 3248.78,2295 3248.98,2295.2 3290.55,2295.2 U2.37 3377.72,2296.1 C12.2 3385,2303.39 3385,2339.14 3390.86,2345 3479.14,2345 3491.02,2356.88 3491.02,2426.7 3380,2537.72 3380,2586.3 C11.2@3380.16,2586.46
  Top Layer w30: C17.2@2922.36,2693.98 2922.36,2698.9 2931.02,2707.56 2935.95,2707.56 2976.42,2748.03 3321.97,2748.03 3381.61,2688.39 C11.2@3381.61,2586.46 ; 3230,2586.46 C11.2@3380.16,2586.46
  Bottom Layer w10: v1(2975,2295) v1(3220,2295)
3V3: C2.1 C3.2 C4.2 C7.2 C8.2 C9.2 C18.1 C19.2 L1.1 L2.1 R9.1 R10.2 R11.2 R12.2 R14.1 TP1.1 U1.2 U1.4 U2.20 U2.31 U2.42 U2.50 U2.56 U3.6 U3.8 Y1.1 Y1.4 | length 6559.4
  Top Layer w10: C3.2 2981.42,2053.03 U2.20 ; U2.56 3079.84,2639.84 v1(3120,2680) ; C9.2 3197.95,2678.66 U2.50 3197.95,2459.13 3261.65,2395.43 3290.55,2395.43 U2.42 3381.14,2394.53 C8.2 ; U2.31 3197.95,2053.66 C4.2
  Top Layer w30: U1.2 1965,2314.72 ; v1(2195,2265) TP1.1 2194.72,2314.72 1965,2314.72 ; TP1.1@2195.81,2314.19 2344.19,2314.19 C19.2 ; C7.2 2249.33,2142.28 2190,2142.28 ; C19.2@2345.2,2313.39 C19.2 ; 2425,2300 2411.61,2313.39 ; v1(2470,2665) 2472,2663 Y1.4 Y1.1 2470.82,2447.5 2469.44,2446.12 2469.44,2342.68 2453.38,2326.62 ; R9.1 2545,2235 2453.38,2326.62 ; 2975.75,1997.69 2975.5,1997.44 ; C3.2 2978.39,2048.64 2986.02,2041 v1(3032.35,2041) 3035,2038.35 3035,1997.44 ; 3201.61,1997.44 3035,1997.44 ; 3201.61,2000.83 C4.2 ; 1965,2314.72 U1.4 1965.67,2142.28 2190,2142.28 ; 2190,2142.28 2190,2063.43 2255.99,1997.44 2975.5,1997.44 ; C19.2 2411.61,2313.39 ; 2411.61,2313.39 2440.15,2313.39 2453.38,2326.62 ; 2975.5,1997.44 3035,1997.44
  Top Layer w50: v1(3120,2680) C9.2
  Bottom Layer w15: 2571.61,2055 2765,2055 2827.97,2117.97 2827.97,2184.51 2846.06,2202.6 R12.2 ; R10.2 2577.6,2556.21 2586.39,2565 R11.2
  Bottom Layer w30: 2245,2290 2245,2385 U3.8 2395,2385 ; U3.6 2215,2285 v1(2195,2265) 2195,2073.43 2218.43,2050 2572.6,2050 ; 2572.11,2055.49 2572.11,2144.51 R14.1 ; R10.2 2440,2495 2397.36,2537.64 2397.36,2587.64 L1.1 2395,2635.71 2424.29,2665 v1(2470,2665) 2485,2680 v1(3120,2680) ; L2.1 3018.6,2050 3027.6,2041 v1(3032.35,2041)
CC1: P2.4 R15.2 | length 299.8
  Top Layer w10: R15.2 1592.6,2452.4 1604.78,2440.22 P2.4
CC2: P2.10 R16.1 | length 280.9
  Top Layer w10: R16.1 1597.6,2307.6 1612.25,2322.25 P2.10
Dataneg1: P2.7 P2.8 U2.7 | length 1280.7
  Top Layer w10: P2.8 1721.79,2361.79 1732.56,2372.55 v1(1735.38,2372.55) ; P2.7 1724.25,2381 1730.25,2375 v1@1735,2375 ; v1(2518.22,2385) 2520.66,2387.44 2756.15,2387.44 2763.24,2394.53 U2.7
  Bottom Layer w10: v1(1735.38,2372.55) 1737.82,2375 2100.49,2375 2135.49,2410 2460.8,2410 2485.8,2385 v1(2518.22,2385)
Dataplus1: P2.5 P2.6 U2.8 | length 1322.6
  Top Layer w10: P2.5 1741.89,2420.21 1745,2417.1 v1@1745,2415 ; P2.6 1728.3,2401 1742.91,2415.61 1744.39,2415.61 v1@1745,2415 ; v1(1750,2420) v1@1745,2415 ; v1(2550,2358.66) 2551.34,2360 2749.92,2360 2764.76,2374.84 U2.8
  Bottom Layer w10: v1(1750,2420) 2118.12,2420 2123.12,2425 2518.92,2425 2550,2393.92 v1(2550,2358.66)
DI: P1.3 R2.2 | length 170.8
  Top Layer w50: R2.2 3662.4,2436.91 3662.99,2437.5 3827.5,2437.5 P1.3
DO: P1.4 R4.2 | length 171.7
  Top Layer w50: R4.2 3811.88,2330 3821.88,2340 P1.4
DONE: P1.1 R6.2 | length 176.1
  Top Layer w50: R6.2 3662.4,2628.94 3662.99,2629.53 3819.53,2629.53 P1.1
FTDI_CLK: R3.1 U2.2 | length 135.9
  Top Layer w10: R3.1 2732.4,2531.06 2770.51,2492.95 U2.2
GND: C1.2 C2.2 C3.1 C4.1 C5.1 C6.1 C7.1 C8.1 C9.1 C10.1 C11.1 C12.1 C13.1 C14.1 C15.1 C16.1 C17.1 C18.2 C19.1 D1.2 P1.7 P2.1 P2.12 R8.1 U1.1 U2.1 U2.5 U2.10 U2.11 U2.13 U2.15 U2.25 U2.35 U2.47 U2.51 U3.5 Y1.2 | length 1119.8
  Top Layer w10: v1(2550,2305) 2554.75,2305 2569.75,2320 C16.1 ; C14.1 2669.87,2432.73 2669.87,2415.86 2675.72,2410 2780,2410 2803.9,2433.9 U2.5 ; 2790,2280 2793.58,2276.42 U2.13 2849.45,2275.51 2879.49,2275.51 2887.09,2267.91 2887.09,2246.68 2878.35,2237.95 2849.45,2237.95 U2.15 ; U2.11 U2.10 ; U2.25 v1(3079.84,2191.47) ; v1(3145,2530) 3148.36,2533.36 3154.08,2533.36 3177.36,2556.65 3177.36,2585.55 U2.51 ; C9.1 3273.39,2675.08 3291.02,2657.44 3327.56,2657.44 v1(3330,2655) ; v1(3395,2465) 3395,2463.31 3458.39,2399.92 C8.1
  Top Layer w15: v1(3400,2230) 3449.6,2230 3458.39,2238.79 C12.1
  Top Layer w20: P2.12 1671.81,2263.19 1706.81,2263.19 v1(1745,2225) ; P2.1 1671.81,2518.81 1708.81,2518.81 v1(1745,2555)
  other v2: 2435,2125 2175,2635 3460,2690
NetC1_1: C1.1 C5.2 C6.2 D1.1 F1.2 U1.3 | length 539.1
  Top Layer w40: U1.3 1873.43,2388.07 1873.43,2488.98 F1.2 1873.94,2491.54 1973.46,2491.54 D1.1 1975.96,2494.04 2105,2494.04 2140,2494.04 2214.04,2494.04 2215,2495 2215.81,2495.81 2304.19,2495.81 C1.1@2305,2496.61
NetR1_1: R1.1 U2.16 | length 1102.1
  Top Layer w10: U2.16 2848.54,2178.78 2855.89,2171.43 2855.89,2148.36 v1(2859.25,2145)
  Top Layer w40: v1(3530,2225) R1.1
  Bottom Layer w10: v1(2859.25,2145) 2859.25,2077.25 2850,2068 2850,2005 2855.86,1999.14 3384.14,1999.14 3530,2145 v1(3530,2225)
NetR2_1: R2.1 U2.17 | length 814.6
  Top Layer w10: U2.17 2923.64,2144.82 2923.64,2193.64 3155,2425 v1(3180,2425)
  Top Layer w15: R2.1@3582.6,2430 R2.1
  Top Layer w40: v1(3536.02,2430) R2.1@3582.6,2430
  Bottom Layer w15: v1(3180,2425) 3182.4,2427.4 3191.28,2427.4 3193.88,2430 v1(3536.02,2430)
NetR3_2: R3.2 Y1.3 | length 100.8
  Top Layer w50: Y1.3 2657.01,2512.5 2657.6,2511.91 R3.2@2657.6,2510
NetR4_1: R4.1 U2.18 | length 766.6
  Top Layer w10: U2.18 2942.95,2144.45 2942.95,2182.95 3090,2330 v1(3180,2330) ; R4.1@3572.6,2345 R4.1
  Top Layer w40: v1(3535,2330) R4.1
  Bottom Layer w10: v1(3180,2330) v1(3535,2330)
NetR5_1: R5.1 U2.21 | length 683
  Top Layer w10: U2.21 3002.01,2142.64 3002.01,2111.23 3048.24,2065 3114.3,2065 3134.3,2045 v1(3135,2045) ; R5.1@3582.6,2130 R5.1
  Top Layer w40: v1(3460,2130) R5.1@3582.6,2130
  Bottom Layer w10: v1(3135,2045) 3375,2045 v1(3460,2130)
NetR6_1: R6.1 U2.23 | length 1018.1
  Top Layer w10: U2.23 3041.38,2144.45 3041.38,2193.34 3049.26,2201.22 3049.26,2201.59 3067.92,2220.25 3230.41,2220.25 3249.43,2201.22 3475.12,2201.22 3500,2226.1 3500,2344.64 3506.02,2350.67 3506.02,2474.82 3500,2480.85 3500,2605 3520,2625
  Top Layer w40: 3520,2625 R6.1
NetR7_1: R7.1 U2.24 | length 993
  Top Layer w10: v1(3060.16,2093.78) U2.24 ; R7.1@3582.6,2535 R7.1
  Top Layer w40: v1(3530,2535) R7.1@3582.6,2535
  Bottom Layer w10: v1(3060.16,2093.78) 3090.56,2093.78 3094.34,2090 3120,2090 3305,2275 3574.14,2275 3580,2280.86 3580,2445 3520,2505 3526.64,2511.64 3526.64,2531.64 v1(3530,2535)
NetR8_2: R8.2 U2.6 | length 591.8
  Top Layer w10: R8.2 2755,2600.86 2760.86,2595 2814.77,2595 2958.2,2451.57 3004.14,2451.57 3010,2445.71 3010,2390.86 3004.14,2385 2930,2385 2900.79,2414.21 U2.6
NetR9_2: R9.2 U2.14 | length 130.1
  Top Layer w10: R9.2 2775,2235 2796.73,2256.73 U2.14
NetR10_1: R10.1 U2.63 U3.1 | length 467.9
  Top Layer w10: v1(2935.24,2515.24) 2935.24,2519.99 2942.05,2526.8 U2.63
  Bottom Layer w15: R10.1@2649.17,2491.77 R10.1 2652.4,2497.15 2670.49,2515.24 v1(2935.24,2515.24)
  Bottom Layer w40: U3.1@2649.17,2395 R10.1@2649.17,2491.77
NetR11_1: R11.1 U2.62 U3.2 | length 674.3
  Top Layer w10: U2.62 2962.64,2585.55 2962.64,2543.31 2965,2540.95 v1(2965,2485.47)
  Bottom Layer w10: U3.2 2814.53,2335 v1(2965,2485.47) 2965,2514.81 2966.15,2515.96 2966.15,2558.85 2965,2560 2960,2565 R11.1 R11.1@2855,2562.4
NetR12_1: R12.1 R13.2 U2.61 U3.3 | length 645.4
  Top Layer w10: U2.61 2981.42,2534.37 2990.78,2525 v1(2994.93,2525)
  Bottom Layer w10: R12.1@2855,2282.4 2855,2340.7 2958.08,2443.78 2968.78,2443.78 2994.93,2469.93 v1(2994.93,2525)
  Bottom Layer w30: U3.3 2650.39,2283.78 2752.01,2283.78 ; R13.2 2750,2281.77 2752.01,2283.78 ; R12.1@2855,2282.4 2853.62,2283.78 2752.01,2283.78
NetR13_1: R13.1 R14.2 U3.4 | length 193.2
  Bottom Layer w30: R14.2 R14.2@2648.29,2145.89 ; U3.4 2648.29,2234.11 R14.2@2648.29,2145.89 ; R13.1 2748.7,2146.3 2648.7,2146.3 R14.2@2648.29,2145.89
NetTP2_1: TP2.1 U2.60 | length 88.5
  Top Layer w10: U2.60 TP2.1@3001.1,2675
RESET: P1.2 R7.2 | length 171.7
  Top Layer w50: R7.2 3811.88,2530 3821.88,2540 P1.2
SK: P1.5 R1.2 | length 175.1
  Top Layer w50: R1.2 3663.39,2228.94 3663.98,2229.53 3682.79,2229.53 3693.27,2240 P1.5
SS: P1.6 R5.2 | length 172
  Top Layer w50: R5.2 3662.4,2138.94 3662.99,2139.53 3666.93,2139.53 3667.4,2140 P1.6
VIN: F1.1 P2.2 P2.11 R15.1 R16.2 | length 1050
  Top Layer w20: P2.11 1795.6,2297 1797.6,2295 ; P2.2 1671.81,2486.81 1794.41,2486.81 F1.1 1797.6,2295 ; R16.2@1677.17,2109.77 R16.2 1780,2105 1797.6,2122.6 1797.6,2295
  Top Layer w30: R15.1 1755,2670 1797.6,2627.4 F1.1
VPHY: C13.2 C14.2 L1.2 U2.4 | length 1098.4
  Top Layer w10: C14.2 2795,2450 2798.58,2453.58 2931.42,2453.58 v1(2970,2415)
  Bottom Layer w10: v1(2970,2415) 3000,2445 C13.2
  Bottom Layer w15: L1.2 2471.77,2594.92 2486.91,2610.06 2491.83,2610.06 2501.77,2620 3035,2620 3041.61,2613.39 C13.2
VPLL: C15.2 C16.2 L2.2 U2.9 | length 662.2
  Top Layer w10: C16.2@2733.39,2320 2733.55,2320.17 2765.17,2320.17 2800.16,2355.16 U2.9 2950.23,2355.16 2955.39,2350 v1(2958.79,2350)
  Bottom Layer w15: L2.2@2888.5,2041.81 2910,2063.31 2910,2301.21 v1(2958.79,2350) C15.2
pads on no net: P2.3 P2.9 P2.15 P2.16 P2.17 P2.18 U2.3 U2.19 U2.22 U2.26 U2.27 U2.28 U2.29 U2.30 U2.32 U2.33 U2.34 U2.36 U2.38 U2.39 U2.40 U2.41 U2.43 U2.44 U2.45 U2.46 U2.48 U2.52 U2.53 U2.54 U2.55 U2.57 U2.58 U2.59 U3.7

## Polygon pours and split planes (outlines as drawn)
GND on Bottom Layer "GND_L02_P001" (solid, pour order 1): 1415,1960 1415,2770 3920,2770 3920,1960
GND on Top Layer "GND_L01_P000" (solid, pour order 0): 1415,1960 1415,2770 3920,2770 3920,1960

## Keep-outs
Keep-Out Layer:
  lines w3.94: 1415,1960 3920,1960 3920,2770 1415,2770 1415,1960

## Silkscreen, mask and mechanical layers (free items; w line width, h text height)
Top Overlay:
  lines w3.94: 2135,2070 2135,2110 ; 2275,2655 2275,2605 2290,2590 2290,2520 ; 2495,2195 2560,2195 2600,2235 2617.17,2235 ; 2525,2360 2575,2360 2617.17,2402.17 2617.17,2411.61 ; 2530,2280 2550,2280 2590,2320 2617.17,2320 ; 2560,2665 2580,2665 2635,2610 2635,2575 ; 3485,2015 3515,2015 3540,2040 3540,2211.85 3553.15,2225 ; 3485,2050 3515,2050 3530,2065 3530,2307.83 3552.17,2330 ; 3490,2090 3510,2090 3520,2100 3520,2413.98 3550.51,2444.49 ; 3490,2125 3510,2145 3510,2487.83 3552.17,2530

## Dimensions
3920,2770 to 3920,1960 on Top Overlay
1415,2770 to 3920,2770 on Top Overlay

## Text inside footprints (layer, text, board x,y; h text height)
C1: Top Overlay "+" at 2229.96,2540.63 h47.24 r270
C2: Top Overlay "+" at 2200.04,2094.37 h47.24 r90